# EAGLE board Panel - Type-C-31-M-12-17 (EAGLE 9.6.2)
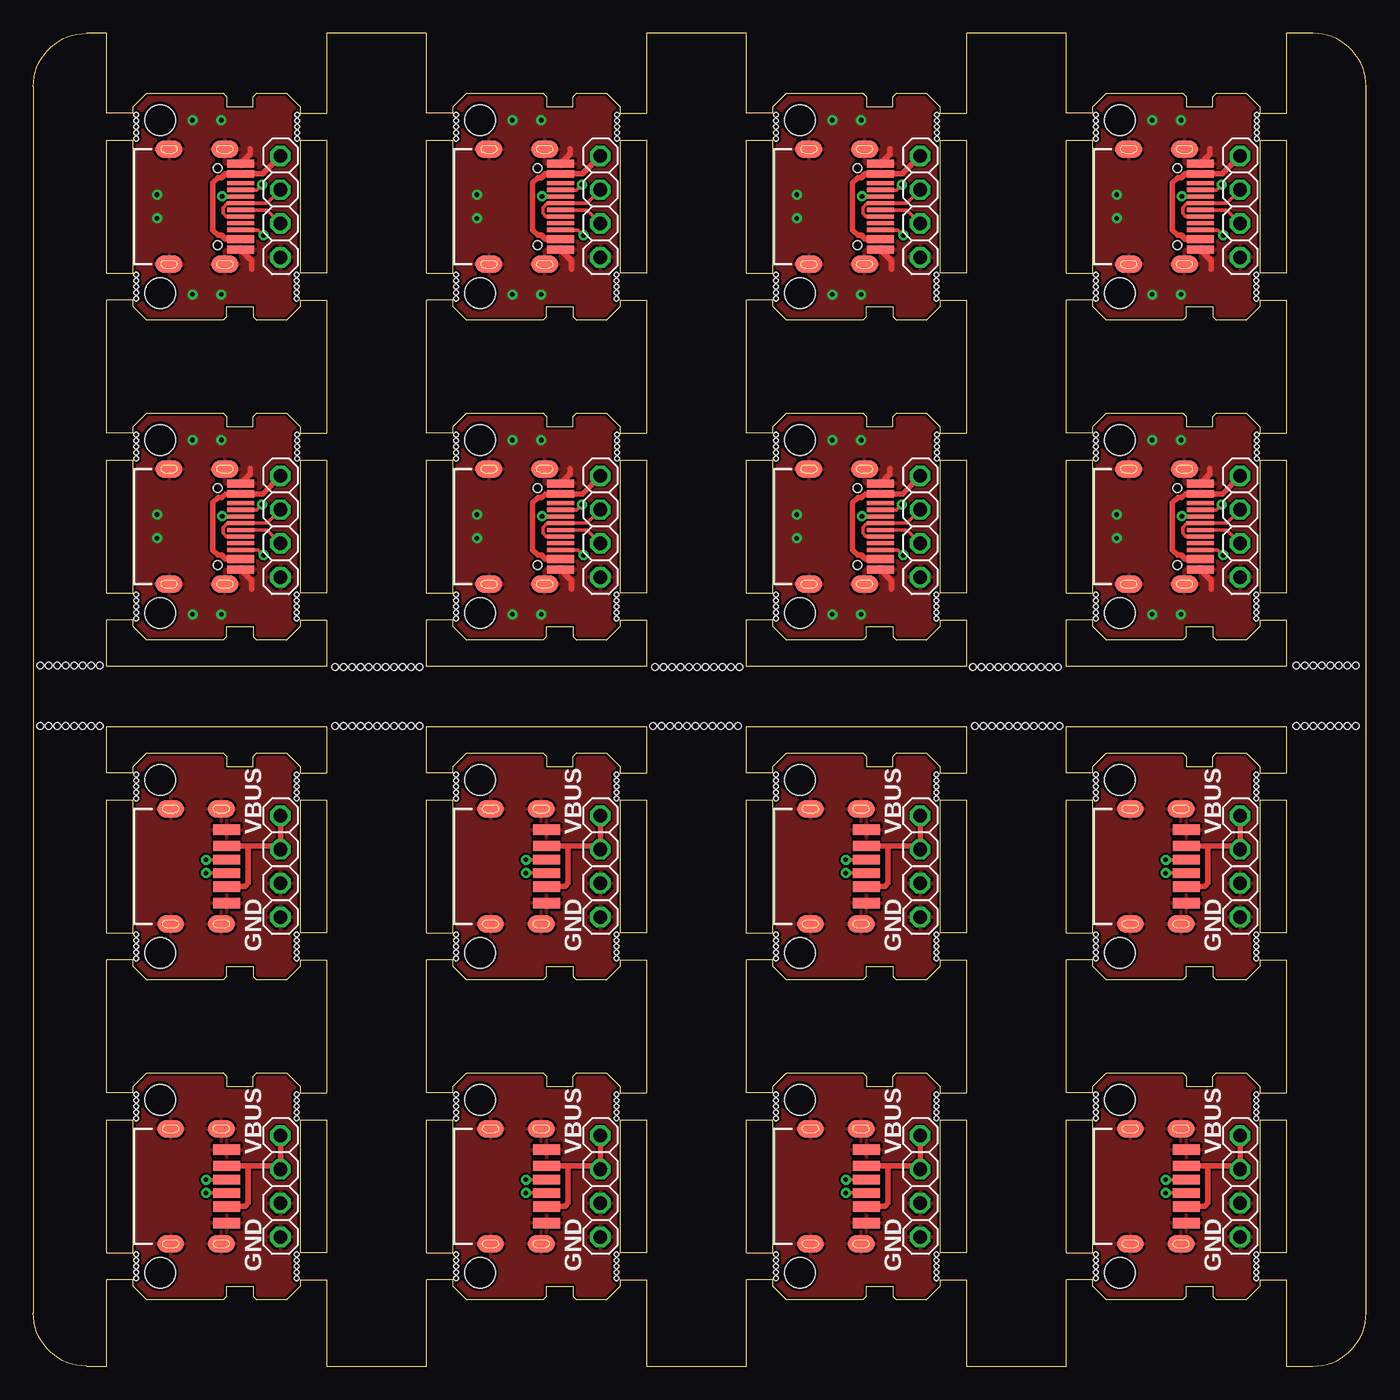
[diagram p0: board, top side]
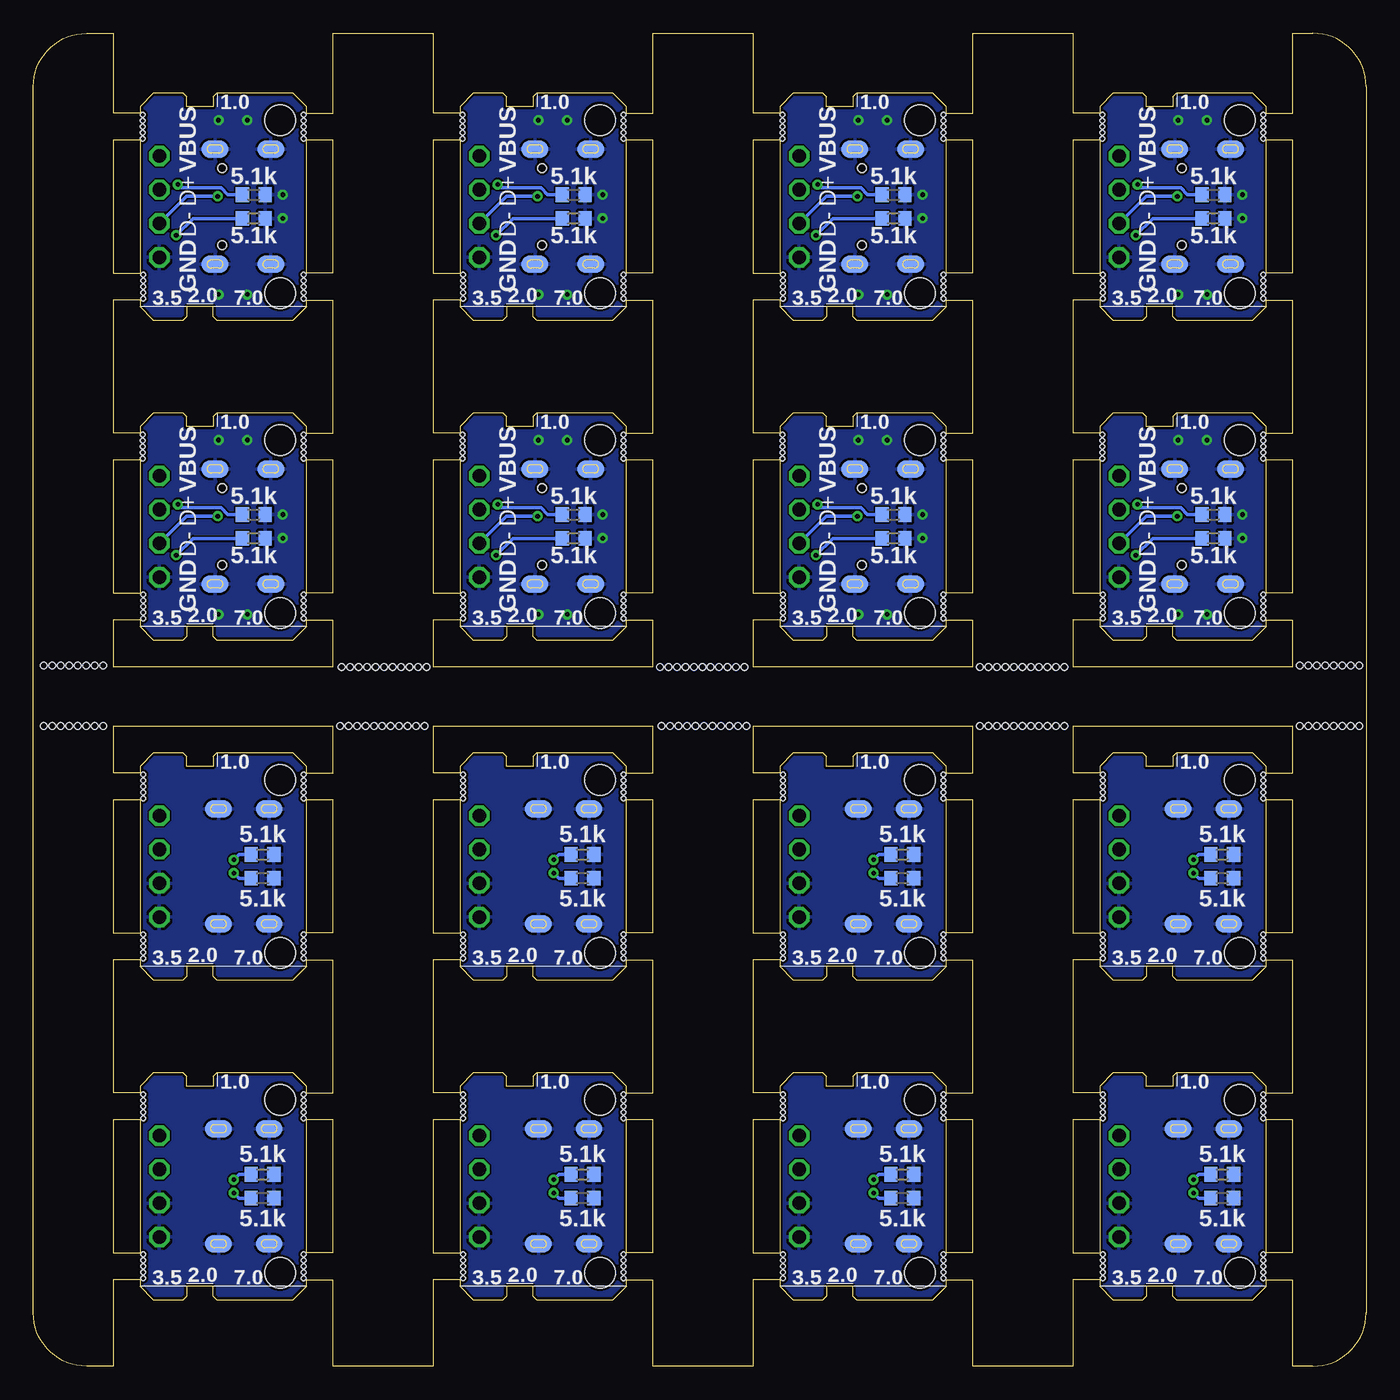
[diagram p1: board, bottom side, seen from below]

Size 100 x 100 mm. Coordinates in mm from the lower left corner, seen from the top.
Outline: 4,0 5.5,0 5.5,6.5 7.5,6.5 7.5,6 8.5,5 14.25,5 14.5,5.25 14.5,6 16.5,6 16.5,5.25 16.75,5 19,5 20,6 20,6.5 22,6.5 22,0 29.5,0 29.5,6.5 31.5,6.5 31.5,6 32.5,5 38.25,5 38.5,5.25 38.5,6 40.5,6 40.5,5.25 40.75,5 43,5 44,6 44,6.5 46,6.5 46,0 53.5,0 53.5,6.5 55.5,6.5 55.5,6 56.5,5 62.25,5 62.5,5.25 62.5,6 64.5,6 64.5,5.25 64.75,5 67,5 68,6 68,6.5 70,6.5 70,0 77.5,0 77.5,6.5 79.5,6.5 79.5,6 80.5,5 86.25,5 86.5,5.25 86.5,6 88.5,6 88.5,5.25 88.75,5 91,5 92,6 92,6.5 94,6.5 94,0 96,0 arc90 100,4 100,96 arc90 96,100 94,100 94,94 92,94 92,94.5 91,95.5 88.75,95.5 88.5,95.25 88.5,94.5 86.5,94.5 86.5,95.25 86.25,95.5 80.5,95.5 79.5,94.5 79.5,94 77.5,94 77.5,100 70,100 70,94 68,94 68,94.5 67,95.5 64.75,95.5 64.5,95.25 64.5,94.5 62.5,94.5 62.5,95.25 62.25,95.5 56.5,95.5 55.5,94.5 55.5,94 53.5,94 53.5,100 46,100 46,94 44,94 44,94.5 43,95.5 40.75,95.5 40.5,95.25 40.5,94.5 38.5,94.5 38.5,95.25 38.25,95.5 32.5,95.5 31.5,94.5 31.5,94 29.5,94 29.5,100 22,100 22,94 20,94 20,94.5 19,95.5 16.75,95.5 16.5,95.25 16.5,94.5 14.5,94.5 14.5,95.25 14.25,95.5 8.5,95.5 7.5,94.5 7.5,94 5.5,94 5.5,100 4,100 arc90 0,96 0,4 arc90 4,0
Outline: 7.5,79.5 7.5,80 5.5,80 5.5,70 7.5,70 7.5,70.5 8.5,71.5 14.25,71.5 14.5,71.25 14.5,70.5 16.5,70.5 16.5,71.25 16.75,71.5 19,71.5 20,70.5 20,70 22,70 22,80 20,80 20,79.5 19,78.5 16.75,78.5 16.5,78.75 16.5,79.5 14.5,79.5 14.5,78.75 14.25,78.5 8.5,78.5 7.5,79.5
Outline: 7.5,82 7.5,92 5.5,92 5.5,82 7.5,82
Outline: 20,92 20,82 22,82 22,92 20,92
Outline: 31.5,79.5 31.5,80 29.5,80 29.5,70 31.5,70 31.5,70.5 32.5,71.5 38.25,71.5 38.5,71.25 38.5,70.5 40.5,70.5 40.5,71.25 40.75,71.5 43,71.5 44,70.5 44,70 46,70 46,80 44,80 44,79.5 43,78.5 40.75,78.5 40.5,78.75 40.5,79.5 38.5,79.5 38.5,78.75 38.25,78.5 32.5,78.5 31.5,79.5
Outline: 31.5,82 31.5,92 29.5,92 29.5,82 31.5,82
Outline: 44,92 44,82 46,82 46,92 44,92
Outline: 55.5,79.5 55.5,80 53.5,80 53.5,70 55.5,70 55.5,70.5 56.5,71.5 62.25,71.5 62.5,71.25 62.5,70.5 64.5,70.5 64.5,71.25 64.75,71.5 67,71.5 68,70.5 68,70 70,70 70,80 68,80 68,79.5 67,78.5 64.75,78.5 64.5,78.75 64.5,79.5 62.5,79.5 62.5,78.75 62.25,78.5 56.5,78.5 55.5,79.5
Outline: 55.5,82 55.5,92 53.5,92 53.5,82 55.5,82
Outline: 68,92 68,82 70,82 70,92 68,92
Outline: 79.5,79.5 79.5,80 77.5,80 77.5,70 79.5,70 79.5,70.5 80.5,71.5 86.25,71.5 86.5,71.25 86.5,70.5 88.5,70.5 88.5,71.25 88.75,71.5 91,71.5 92,70.5 92,70 94,70 94,80 92,80 92,79.5 91,78.5 88.75,78.5 88.5,78.75 88.5,79.5 86.5,79.5 86.5,78.75 86.25,78.5 80.5,78.5 79.5,79.5
Outline: 79.5,82 79.5,92 77.5,92 77.5,82 79.5,82
Outline: 92,92 92,82 94,82 94,92 92,92
Outline: 7.5,55.5 7.5,56 5.5,56 5.5,52.5 22,52.5 22,56 20,56 20,55.5 19,54.5 16.75,54.5 16.5,54.75 16.5,55.5 14.5,55.5 14.5,54.75 14.25,54.5 8.5,54.5 7.5,55.5
Outline: 7.5,58 7.5,68 5.5,68 5.5,58 7.5,58
Outline: 20,68 20,58 22,58 22,68 20,68
Outline: 31.5,55.5 31.5,56 29.5,56 29.5,52.5 46,52.5 46,56 44,56 44,55.5 43,54.5 40.75,54.5 40.5,54.75 40.5,55.5 38.5,55.5 38.5,54.75 38.25,54.5 32.5,54.5 31.5,55.5
Outline: 31.5,58 31.5,68 29.5,68 29.5,58 31.5,58
Outline: 44,68 44,58 46,58 46,68 44,68
Outline: 55.5,55.5 55.5,56 53.5,56 53.5,52.5 70,52.5 70,56 68,56 68,55.5 67,54.5 64.75,54.5 64.5,54.75 64.5,55.5 62.5,55.5 62.5,54.75 62.25,54.5 56.5,54.5 55.5,55.5
Outline: 55.5,58 55.5,68 53.5,68 53.5,58 55.5,58
Outline: 68,68 68,58 70,58 70,68 68,68
Outline: 79.5,55.5 79.5,56 77.5,56 77.5,52.5 94,52.5 94,56 92,56 92,55.5 91,54.5 88.75,54.5 88.5,54.75 88.5,55.5 86.5,55.5 86.5,54.75 86.25,54.5 80.5,54.5 79.5,55.5
Outline: 79.5,58 79.5,68 77.5,68 77.5,58 79.5,58
Outline: 92,68 92,58 94,58 94,68 92,68
Outline: 7.5,30 7.5,30.5 5.5,30.5 5.5,20.5 7.5,20.5 7.5,21 8.5,22 14.25,22 14.5,21.75 14.5,21 16.5,21 16.5,21.75 16.75,22 19,22 20,21 20,20.5 22,20.5 22,30.5 20,30.5 20,30 19,29 16.75,29 16.5,29.25 16.5,30 14.5,30 14.5,29.25 14.25,29 8.5,29 7.5,30
Outline: 7.5,32.5 7.5,42.5 5.5,42.5 5.5,32.5 7.5,32.5
Outline: 7.5,44.5 7.5,45 8.5,46 14.25,46 14.5,45.75 14.5,45 16.5,45 16.5,45.75 16.75,46 19,46 20,45 20,44.5 22,44.5 22,48 5.5,48 5.5,44.5 7.5,44.5
Outline: 20,42.5 20,32.5 22,32.5 22,42.5 20,42.5
Outline: 31.5,30 31.5,30.5 29.5,30.5 29.5,20.5 31.5,20.5 31.5,21 32.5,22 38.25,22 38.5,21.75 38.5,21 40.5,21 40.5,21.75 40.75,22 43,22 44,21 44,20.5 46,20.5 46,30.5 44,30.5 44,30 43,29 40.75,29 40.5,29.25 40.5,30 38.5,30 38.5,29.25 38.25,29 32.5,29 31.5,30
Outline: 31.5,32.5 31.5,42.5 29.5,42.5 29.5,32.5 31.5,32.5
Outline: 31.5,44.5 31.5,45 32.5,46 38.25,46 38.5,45.75 38.5,45 40.5,45 40.5,45.75 40.75,46 43,46 44,45 44,44.5 46,44.5 46,48 29.5,48 29.5,44.5 31.5,44.5
Outline: 44,42.5 44,32.5 46,32.5 46,42.5 44,42.5
Outline: 55.5,30 55.5,30.5 53.5,30.5 53.5,20.5 55.5,20.5 55.5,21 56.5,22 62.25,22 62.5,21.75 62.5,21 64.5,21 64.5,21.75 64.75,22 67,22 68,21 68,20.5 70,20.5 70,30.5 68,30.5 68,30 67,29 64.75,29 64.5,29.25 64.5,30 62.5,30 62.5,29.25 62.25,29 56.5,29 55.5,30
Outline: 55.5,32.5 55.5,42.5 53.5,42.5 53.5,32.5 55.5,32.5
Outline: 55.5,44.5 55.5,45 56.5,46 62.25,46 62.5,45.75 62.5,45 64.5,45 64.5,45.75 64.75,46 67,46 68,45 68,44.5 70,44.5 70,48 53.5,48 53.5,44.5 55.5,44.5
Outline: 68,42.5 68,32.5 70,32.5 70,42.5 68,42.5
Outline: 79.5,30 79.5,30.5 77.5,30.5 77.5,20.5 79.5,20.5 79.5,21 80.5,22 86.25,22 86.5,21.75 86.5,21 88.5,21 88.5,21.75 88.75,22 91,22 92,21 92,20.5 94,20.5 94,30.5 92,30.5 92,30 91,29 88.75,29 88.5,29.25 88.5,30 86.5,30 86.5,29.25 86.25,29 80.5,29 79.5,30
Outline: 79.5,32.5 79.5,42.5 77.5,42.5 77.5,32.5 79.5,32.5
Outline: 79.5,44.5 79.5,45 80.5,46 86.25,46 86.5,45.75 86.5,45 88.5,45 88.5,45.75 88.75,46 91,46 92,45 92,44.5 94,44.5 94,48 77.5,48 77.5,44.5 79.5,44.5
Outline: 92,42.5 92,32.5 94,32.5 94,42.5 92,42.5
Outline: 7.5,8.5 7.5,18.5 5.5,18.5 5.5,8.5 7.5,8.5
Outline: 20,18.5 20,8.5 22,8.5 22,18.5 20,18.5
Outline: 31.5,8.5 31.5,18.5 29.5,18.5 29.5,8.5 31.5,8.5
Outline: 44,18.5 44,8.5 46,8.5 46,18.5 44,18.5
Outline: 55.5,8.5 55.5,18.5 53.5,18.5 53.5,8.5 55.5,8.5
Outline: 68,18.5 68,8.5 70,8.5 70,18.5 68,18.5
Outline: 79.5,8.5 79.5,18.5 77.5,18.5 77.5,8.5 79.5,8.5
Outline: 92,18.5 92,8.5 94,8.5 94,18.5 92,18.5
Copper layers (1*16): Top 0.035mm / dielectric 1.5mm / Bottom 0.035mm
Design rules "JLCPCB_2-Layer": minimum track width 5mil, minimum drill 0.2mm, track to track 5mil, track to pad 5mil, pad to pad 5mil, via to via 5mil, smd to smd 5mil, copper to edge 8mil, drill to drill 3mil, minimum pad ring 3mil, minimum via ring 0.2mm, stop-mask expansion 4mil, vias tented up to drill 15mil, thermal gap 8mil
Net classes: 0 default: width 0.254 mm; 1 power: width 0.406 mm
Holes 2.3 mm at 9.5,93.5 9.5,80.5 33.5,93.5 33.5,80.5 57.5,93.5 57.5,80.5 81.5,93.5 81.5,80.5 9.5,69.5 9.5,56.5 33.5,69.5 33.5,56.5 57.5,69.5 57.5,56.5 81.5,69.5 81.5,56.5 9.5,44 9.5,31 33.5,44 33.5,31 57.5,44 57.5,31 81.5,44 81.5,31 9.5,20 9.5,7 33.5,20 33.5,7 57.5,20 57.5,7 81.5,20 81.5,7
Holes 0.35 mm at 7.71,93.91 7.71,93.46 7.71,93.01 7.71,92.56 7.71,92.11 19.8,93.91 19.8,93.46 19.8,93.01 19.8,92.56 19.8,92.11 19.77,81.89 19.77,81.44 19.77,80.99 19.77,80.54 19.77,80.09 7.71,81.89 7.71,81.44 7.71,80.99 7.71,80.54 7.71,80.09 31.71,93.91 31.71,93.46 31.71,93.01 31.71,92.56 31.71,92.11 43.8,93.91 43.8,93.46 43.8,93.01 43.8,92.56 43.8,92.11 43.77,81.89 43.77,81.44 43.77,80.99 43.77,80.54 43.77,80.09 31.71,81.89 31.71,81.44 31.71,80.99 31.71,80.54 31.71,80.09 55.71,93.91 55.71,93.46 55.71,93.01 55.71,92.56 55.71,92.11 67.8,93.91 67.8,93.46 67.8,93.01 67.8,92.56 67.8,92.11 67.77,81.89 67.77,81.44 67.77,80.99 67.77,80.54 67.77,80.09 55.71,81.89 55.71,81.44 55.71,80.99 55.71,80.54 55.71,80.09 79.71,93.91 79.71,93.46 79.71,93.01 79.71,92.56 79.71,92.11 91.8,93.91 91.8,93.46 91.8,93.01 91.8,92.56 91.8,92.11 91.77,81.89 91.77,81.44 91.77,80.99 91.77,80.54 91.77,80.09 79.71,81.89 79.71,81.44 79.71,80.99 79.71,80.54 79.71,80.09 7.71,69.91 7.71,69.46 7.71,69.01 7.71,68.56 7.71,68.11 19.8,69.91 19.8,69.46 19.8,69.01 19.8,68.56 19.8,68.11 19.77,57.89 19.77,57.44 19.77,56.99 19.77,56.54 19.77,56.09 7.71,57.89 7.71,57.44 7.71,56.99 7.71,56.54 7.71,56.09 31.71,69.91 31.71,69.46 31.71,69.01 31.71,68.56 31.71,68.11 43.8,69.91 43.8,69.46 43.8,69.01 43.8,68.56 43.8,68.11 43.77,57.89 43.77,57.44 43.77,56.99 43.77,56.54 43.77,56.09 31.71,57.89 31.71,57.44 31.71,56.99 31.71,56.54 31.71,56.09 55.71,69.91 55.71,69.46 55.71,69.01 55.71,68.56 55.71,68.11 67.8,69.91 67.8,69.46 67.8,69.01 67.8,68.56 67.8,68.11 67.77,57.89 67.77,57.44 67.77,56.99 67.77,56.54 67.77,56.09 55.71,57.89 55.71,57.44 55.71,56.99 55.71,56.54 55.71,56.09 79.71,69.91 79.71,69.46 79.71,69.01 79.71,68.56 79.71,68.11 91.8,69.91 91.8,69.46 91.8,69.01 91.8,68.56 91.8,68.11 91.77,57.89 91.77,57.44 91.77,56.99 91.77,56.54 91.77,56.09 79.71,57.89 79.71,57.44 79.71,56.99 79.71,56.54 79.71,56.09 7.71,44.41 7.71,43.96 7.71,43.51 7.71,43.06 7.71,42.61 19.77,44.38 19.77,43.93 19.77,43.48 19.77,43.03 19.77,42.58 19.77,32.39 19.77,31.94 19.77,31.49 19.77,31.04 19.77,30.59 7.73,32.39 7.73,31.94 7.73,31.49 7.73,31.04 7.73,30.59 31.71,44.41 31.71,43.96 31.71,43.51 31.71,43.06 31.71,42.61 43.77,44.38 43.77,43.93 43.77,43.48 43.77,43.03 43.77,42.58 43.77,32.39 43.77,31.94 43.77,31.49 43.77,31.04 43.77,30.59 31.73,32.39 31.73,31.94 31.73,31.49 31.73,31.04 31.73,30.59 55.71,44.41 55.71,43.96 55.71,43.51 55.71,43.06 55.71,42.61 67.77,44.38 67.77,43.93 67.77,43.48 67.77,43.03 67.77,42.58 67.77,32.39 67.77,31.94 67.77,31.49 67.77,31.04 67.77,30.59 55.73,32.39 55.73,31.94 55.73,31.49 55.73,31.04 55.73,30.59 79.71,44.41 79.71,43.96 79.71,43.51 79.71,43.06 79.71,42.61 91.77,44.38 91.77,43.93 91.77,43.48 91.77,43.03 91.77,42.58 91.77,32.39 91.77,31.94 91.77,31.49 91.77,31.04 91.77,30.59 79.73,32.39 79.73,31.94 79.73,31.49 79.73,31.04 79.73,30.59 7.71,20.41 7.71,19.96 7.71,19.51 7.71,19.06 7.71,18.61 19.77,20.38 19.77,19.93 19.77,19.48 19.77,19.03 19.77,18.58 19.77,8.39 19.77,7.94 19.77,7.49 19.77,7.04 19.77,6.59 7.73,8.39 7.73,7.94 7.73,7.49 7.73,7.04 7.73,6.59 31.71,20.41 31.71,19.96 31.71,19.51 31.71,19.06 31.71,18.61 43.77,20.38 43.77,19.93 43.77,19.48 43.77,19.03 43.77,18.58 43.77,8.39 43.77,7.94 43.77,7.49 43.77,7.04 43.77,6.59 31.73,8.39 31.73,7.94 31.73,7.49 31.73,7.04 31.73,6.59 55.71,20.41 55.71,19.96 55.71,19.51 55.71,19.06 55.71,18.61 67.77,20.38 67.77,19.93 67.77,19.48 67.77,19.03 67.77,18.58 67.77,8.39 67.77,7.94 67.77,7.49 67.77,7.04 67.77,6.59 55.73,8.39 55.73,7.94 55.73,7.49 55.73,7.04 55.73,6.59 79.71,20.41 79.71,19.96 79.71,19.51 79.71,19.06 79.71,18.61 91.77,20.38 91.77,19.93 91.77,19.48 91.77,19.03 91.77,18.58 91.77,8.39 91.77,7.94 91.77,7.49 91.77,7.04 91.77,6.59 79.73,8.39 79.73,7.94 79.73,7.49 79.73,7.04 79.73,6.59
Holes 0.5 mm at 22.63,48.01 23.27,48.01 23.9,48.01 24.54,48.01 25.17,48.01 25.81,48.01 26.44,48.01 27.08,48.01 27.71,48.01 28.35,48.01 28.98,48.01 46.51,48.01 47.14,48.01 47.78,48.01 48.41,48.01 49.05,48.01 49.68,48.01 50.32,48.01 50.95,48.01 51.59,48.01 52.22,48.01 52.86,48.01 22.63,52.46 23.27,52.46 23.9,52.46 24.54,52.46 25.17,52.46 25.81,52.46 26.44,52.46 27.08,52.46 27.71,52.46 28.35,52.46 28.98,52.46 46.64,52.46 47.27,52.46 47.91,52.46 48.54,52.46 49.18,52.46 49.81,52.46 50.45,52.46 51.08,52.46 51.72,52.46 52.35,52.46 52.99,52.46 70.51,52.46 71.15,52.46 71.78,52.46 72.42,52.46 73.05,52.46 73.69,52.46 74.32,52.46 74.96,52.46 75.59,52.46 76.23,52.46 76.86,52.46 70.64,48.01 71.27,48.01 71.91,48.01 72.54,48.01 73.18,48.01 73.81,48.01 74.45,48.01 75.08,48.01 75.72,48.01 76.35,48.01 76.99,48.01 0.54,52.59 1.17,52.59 1.8,52.59 2.44,52.59 3.08,52.59 3.71,52.59 4.34,52.59 4.98,52.59 0.54,48.01 1.17,48.01 1.8,48.01 2.44,48.01 3.08,48.01 3.71,48.01 4.34,48.01 4.98,48.01 94.77,52.59 95.4,52.59 96.04,52.59 96.67,52.59 97.31,52.59 97.94,52.59 98.58,52.59 99.21,52.59 94.77,48.01 95.4,48.01 96.04,48.01 96.67,48.01 97.31,48.01 97.94,48.01 98.58,48.01 99.21,48.01

## Footprints (pad centres in the part's own frame; a part is rotated, then mirrored left to right if it is on the bottom)
USB-TYPE-C-31-M-12 = smd 0.3 x 2: A5 -1.25,1.19; A6 -0.25,1.19; A7 0.25,1.19; A8 1.25,1.19; B5 1.75,1.19; B6 0.75,1.19; B7 -0.75,1.19; B8 -1.75,1.19 | smd 0.6 x 2: GND1 -3.225,1.19; GND2 3.225,1.19; VBUS1 -2.45,1.19; VBUS2 2.45,1.19 | smd 1.3 x 2 bottom: SHLD-B1 -4.32,0; SHLD-B2 4.32,0; SHLD-B3 -4.32,-4.18; SHLD-B4 4.32,-4.18 | smd 1.3 x 2: SHLD-T1 -4.32,0; SHLD-T2 4.32,0; SHLD-T3 -4.32,-4.18; SHLD-T4 4.32,-4.18 | hole 0.65: -2.89,-0.53; 2.89,-0.53
USB-TYPE-C-31-M-17 = smd 0.7 x 2: CC1 -0.5,0.4; CC2 0.5,0.4 | smd 0.8 x 2: GND -2.75,0.4; GND_2 2.75,0.4 | smd 1.3 x 2 bottom: SHLD-B1 -4.32,0; SHLD-B2 4.32,0; SHLD-B3 -4.32,-3.8; SHLD-B4 4.32,-3.8 | smd 1.3 x 2: SHLD-T1 -4.32,0; SHLD-T2 4.32,0; SHLD-T3 -4.32,-3.8; SHLD-T4 4.32,-3.8 | smd 0.76 x 2: VBUS -1.52,0.4; VBUS_2 1.52,0.4
1X04 = drill 1.016 octagon: 1 -3.81,0; 2 -1.27,0; 3 1.27,0; 4 3.81,0
R0603 = smd 1 x 1.1: 1 -0.85,0; 2 0.85,0

## Placement (x,y rotation side)
J1  USB-TYPE-C-31-M-12  [USB-TYPE-C-31-M-12]  14.37,87 270 top
J2  USB-TYPE-C-31-M-12  [USB-TYPE-C-31-M-12]  38.37,87 270 top
J3  USB-TYPE-C-31-M-12  [USB-TYPE-C-31-M-12]  62.37,87 270 top
J4  USB-TYPE-C-31-M-12  [USB-TYPE-C-31-M-12]  86.37,87 270 top
J5  USB-TYPE-C-31-M-12  [USB-TYPE-C-31-M-12]  14.37,63 270 top
J6  USB-TYPE-C-31-M-12  [USB-TYPE-C-31-M-12]  38.37,63 270 top
J7  USB-TYPE-C-31-M-12  [USB-TYPE-C-31-M-12]  62.37,63 270 top
J8  USB-TYPE-C-31-M-12  [USB-TYPE-C-31-M-12]  86.37,63 270 top
J9  USB-TYPE-C-31-M-17  [USB-TYPE-C-31-M-17]  14.1,37.5 270 top
J10  USB-TYPE-C-31-M-17  [USB-TYPE-C-31-M-17]  38.1,37.5 270 top
J11  USB-TYPE-C-31-M-17  [USB-TYPE-C-31-M-17]  62.1,37.5 270 top
J12  USB-TYPE-C-31-M-17  [USB-TYPE-C-31-M-17]  86.1,37.5 270 top
J13  USB-TYPE-C-31-M-17  [USB-TYPE-C-31-M-17]  14.1,13.5 270 top
J14  USB-TYPE-C-31-M-17  [USB-TYPE-C-31-M-17]  38.1,13.5 270 top
J15  USB-TYPE-C-31-M-17  [USB-TYPE-C-31-M-17]  62.1,13.5 270 top
J16  USB-TYPE-C-31-M-17  [USB-TYPE-C-31-M-17]  86.1,13.5 270 top
JP1  [1X04]  18.55,87 270 top
JP2  [1X04]  42.55,87 270 top
JP3  [1X04]  66.55,87 270 top
JP4  [1X04]  90.55,87 270 top
JP5  [1X04]  18.55,63 270 top
JP6  [1X04]  42.55,63 270 top
JP7  [1X04]  66.55,63 270 top
JP8  [1X04]  90.55,63 270 top
JP9  [1X04]  18.55,37.5 270 top
JP10  [1X04]  42.55,37.5 270 top
JP11  [1X04]  66.55,37.5 270 top
JP12  [1X04]  90.55,37.5 270 top
JP13  [1X04]  18.55,13.5 270 top
JP14  [1X04]  42.55,13.5 270 top
JP15  [1X04]  66.55,13.5 270 top
JP16  [1X04]  90.55,13.5 270 top
R1  5.1k  [R0603]  11.46,87.89 0 bottom
R2  5.1k  [R0603]  11.46,86.11 0 bottom
R3  5.1k  [R0603]  35.46,87.89 0 bottom
R4  5.1k  [R0603]  35.46,86.11 0 bottom
R5  5.1k  [R0603]  59.46,87.89 0 bottom
R6  5.1k  [R0603]  59.46,86.11 0 bottom
R7  5.1k  [R0603]  83.46,87.89 0 bottom
R8  5.1k  [R0603]  83.46,86.11 0 bottom
R9  5.1k  [R0603]  11.46,63.89 0 bottom
R10  5.1k  [R0603]  11.46,62.11 0 bottom
R11  5.1k  [R0603]  35.46,63.89 0 bottom
R12  5.1k  [R0603]  35.46,62.11 0 bottom
R13  5.1k  [R0603]  59.46,63.89 0 bottom
R14  5.1k  [R0603]  59.46,62.11 0 bottom
R15  5.1k  [R0603]  83.46,63.89 0 bottom
R16  5.1k  [R0603]  83.46,62.11 0 bottom
R17  5.1k  [R0603]  10.8,38.39 0 bottom
R18  5.1k  [R0603]  10.8,36.61 0 bottom
R19  5.1k  [R0603]  34.8,38.39 0 bottom
R20  5.1k  [R0603]  34.8,36.61 0 bottom
R21  5.1k  [R0603]  58.8,38.39 0 bottom
R22  5.1k  [R0603]  58.8,36.61 0 bottom
R23  5.1k  [R0603]  82.8,38.39 0 bottom
R24  5.1k  [R0603]  82.8,36.61 0 bottom
R25  5.1k  [R0603]  10.8,14.39 0 bottom
R26  5.1k  [R0603]  10.8,12.61 0 bottom
R27  5.1k  [R0603]  34.8,14.39 0 bottom
R28  5.1k  [R0603]  34.8,12.61 0 bottom
R29  5.1k  [R0603]  58.8,14.39 0 bottom
R30  5.1k  [R0603]  58.8,12.61 0 bottom
R31  5.1k  [R0603]  82.8,14.39 0 bottom
R32  5.1k  [R0603]  82.8,12.61 0 bottom

## Library data of the parts
J1-J16 = angrypig7-Connectors
JP1-JP16 = angrypig7-Connectors-PinHeads
R1-R32 = angrypig7-RCL; SPICEPREFIX: R

## Nets
GND [power]: J1.GND1 J1.GND2 J1.SHLD-B1 J1.SHLD-B2 J1.SHLD-B3 J1.SHLD-B4 J1.SHLD-T1 J1.SHLD-T2 J1.SHLD-T3 J1.SHLD-T4 JP1.4 R1.2 R2.2
GND1 [power]: J2.GND1 J2.GND2 J2.SHLD-B1 J2.SHLD-B2 J2.SHLD-B3 J2.SHLD-B4 J2.SHLD-T1 J2.SHLD-T2 J2.SHLD-T3 J2.SHLD-T4 JP2.4 R3.2 R4.2
GND2 [power]: J3.GND1 J3.GND2 J3.SHLD-B1 J3.SHLD-B2 J3.SHLD-B3 J3.SHLD-B4 J3.SHLD-T1 J3.SHLD-T2 J3.SHLD-T3 J3.SHLD-T4 JP3.4 R5.2 R6.2
GND3 [power]: J4.GND1 J4.GND2 J4.SHLD-B1 J4.SHLD-B2 J4.SHLD-B3 J4.SHLD-B4 J4.SHLD-T1 J4.SHLD-T2 J4.SHLD-T3 J4.SHLD-T4 JP4.4 R7.2 R8.2
GND4 [power]: J5.GND1 J5.GND2 J5.SHLD-B1 J5.SHLD-B2 J5.SHLD-B3 J5.SHLD-B4 J5.SHLD-T1 J5.SHLD-T2 J5.SHLD-T3 J5.SHLD-T4 JP5.4 R9.2 R10.2
GND5 [power]: J6.GND1 J6.GND2 J6.SHLD-B1 J6.SHLD-B2 J6.SHLD-B3 J6.SHLD-B4 J6.SHLD-T1 J6.SHLD-T2 J6.SHLD-T3 J6.SHLD-T4 JP6.4 R11.2 R12.2
GND6 [power]: J7.GND1 J7.GND2 J7.SHLD-B1 J7.SHLD-B2 J7.SHLD-B3 J7.SHLD-B4 J7.SHLD-T1 J7.SHLD-T2 J7.SHLD-T3 J7.SHLD-T4 JP7.4 R13.2 R14.2
GND7 [power]: J8.GND1 J8.GND2 J8.SHLD-B1 J8.SHLD-B2 J8.SHLD-B3 J8.SHLD-B4 J8.SHLD-T1 J8.SHLD-T2 J8.SHLD-T3 J8.SHLD-T4 JP8.4 R15.2 R16.2
GND8 [power]: J9.GND J9.GND_2 J9.SHLD-B1 J9.SHLD-B2 J9.SHLD-B3 J9.SHLD-B4 J9.SHLD-T1 J9.SHLD-T2 J9.SHLD-T3 J9.SHLD-T4 JP9.3 JP9.4 R17.2 R18.2
GND9 [power]: J10.GND J10.GND_2 J10.SHLD-B1 J10.SHLD-B2 J10.SHLD-B3 J10.SHLD-B4 J10.SHLD-T1 J10.SHLD-T2 J10.SHLD-T3 J10.SHLD-T4 JP10.3 JP10.4 R19.2 R20.2
GND10 [power]: J11.GND J11.GND_2 J11.SHLD-B1 J11.SHLD-B2 J11.SHLD-B3 J11.SHLD-B4 J11.SHLD-T1 J11.SHLD-T2 J11.SHLD-T3 J11.SHLD-T4 JP11.3 JP11.4 R21.2 R22.2
GND11 [power]: J12.GND J12.GND_2 J12.SHLD-B1 J12.SHLD-B2 J12.SHLD-B3 J12.SHLD-B4 J12.SHLD-T1 J12.SHLD-T2 J12.SHLD-T3 J12.SHLD-T4 JP12.3 JP12.4 R23.2 R24.2
GND12 [power]: J13.GND J13.GND_2 J13.SHLD-B1 J13.SHLD-B2 J13.SHLD-B3 J13.SHLD-B4 J13.SHLD-T1 J13.SHLD-T2 J13.SHLD-T3 J13.SHLD-T4 JP13.3 JP13.4 R25.2 R26.2
GND13 [power]: J14.GND J14.GND_2 J14.SHLD-B1 J14.SHLD-B2 J14.SHLD-B3 J14.SHLD-B4 J14.SHLD-T1 J14.SHLD-T2 J14.SHLD-T3 J14.SHLD-T4 JP14.3 JP14.4 R27.2 R28.2
GND14 [power]: J15.GND J15.GND_2 J15.SHLD-B1 J15.SHLD-B2 J15.SHLD-B3 J15.SHLD-B4 J15.SHLD-T1 J15.SHLD-T2 J15.SHLD-T3 J15.SHLD-T4 JP15.3 JP15.4 R29.2 R30.2
GND15 [power]: J16.GND J16.GND_2 J16.SHLD-B1 J16.SHLD-B2 J16.SHLD-B3 J16.SHLD-B4 J16.SHLD-T1 J16.SHLD-T2 J16.SHLD-T3 J16.SHLD-T4 JP16.3 JP16.4 R31.2 R32.2
N$1: J2.A6 J2.B6 JP2.2
N$2: J1.A6 J1.B6 JP1.2
N$3: J1.A7 J1.B7 JP1.3
N$4: J2.A7 J2.B7 JP2.3
N$5: J1.A5 R1.1
N$6: J1.B5 R2.1
N$7: J2.A5 R3.1
N$8: J2.B5 R4.1
N$9: J3.A6 J3.B6 JP3.2
N$10: J3.A7 J3.B7 JP3.3
N$11: J3.A5 R5.1
N$12: J3.B5 R6.1
N$13: J4.A6 J4.B6 JP4.2
N$14: J4.A7 J4.B7 JP4.3
N$15: J4.A5 R7.1
N$16: J4.B5 R8.1
N$17: J5.A6 J5.B6 JP5.2
N$18: J5.A7 J5.B7 JP5.3
N$19: J5.A5 R9.1
N$20: J5.B5 R10.1
N$21: J6.A6 J6.B6 JP6.2
N$22: J6.A7 J6.B7 JP6.3
N$23: J6.A5 R11.1
N$24: J6.B5 R12.1
N$25: J7.A6 J7.B6 JP7.2
N$26: J7.A7 J7.B7 JP7.3
N$27: J7.A5 R13.1
N$28: J7.B5 R14.1
N$29: J8.A6 J8.B6 JP8.2
N$30: J8.A7 J8.B7 JP8.3
N$31: J8.A5 R15.1
N$32: J8.B5 R16.1
N$33: J9.CC1 R17.1
N$34: J9.CC2 R18.1
N$35: J10.CC1 R19.1
N$36: J10.CC2 R20.1
N$37: J11.CC1 R21.1
N$38: J11.CC2 R22.1
N$39: J12.CC1 R23.1
N$40: J12.CC2 R24.1
N$41: J13.CC1 R25.1
N$42: J13.CC2 R26.1
N$43: J14.CC1 R27.1
N$44: J14.CC2 R28.1
N$45: J15.CC1 R29.1
N$46: J15.CC2 R30.1
N$47: J16.CC1 R31.1
N$48: J16.CC2 R32.1
VBUS [power]: J1.VBUS1 J1.VBUS2 JP1.1
VBUS1 [power]: J2.VBUS1 J2.VBUS2 JP2.1
VBUS2 [power]: J3.VBUS1 J3.VBUS2 JP3.1
VBUS3 [power]: J4.VBUS1 J4.VBUS2 JP4.1
VBUS4 [power]: J5.VBUS1 J5.VBUS2 JP5.1
VBUS5 [power]: J6.VBUS1 J6.VBUS2 JP6.1
VBUS6 [power]: J7.VBUS1 J7.VBUS2 JP7.1
VBUS7 [power]: J8.VBUS1 J8.VBUS2 JP8.1
VBUS8 [power]: J9.VBUS J9.VBUS_2 JP9.1 JP9.2
VBUS9 [power]: J10.VBUS J10.VBUS_2 JP10.1 JP10.2
VBUS10 [power]: J11.VBUS J11.VBUS_2 JP11.1 JP11.2
VBUS11 [power]: J12.VBUS J12.VBUS_2 JP12.1 JP12.2
VBUS12 [power]: J13.VBUS J13.VBUS_2 JP13.1 JP13.2
VBUS13 [power]: J14.VBUS J14.VBUS_2 JP14.1 JP14.2
VBUS14 [power]: J15.VBUS J15.VBUS_2 JP15.1 JP15.2
VBUS15 [power]: J16.VBUS J16.VBUS_2 JP16.1 JP16.2

## Tracks (layer width: path | path; a pad name or v marks a point on that pad's centre or on a via)
GND  (via drill 0.35)
  Top 0.406: J1.GND2 16.39,82.94 16.39,82.31 | J1.GND1 16.26,90.93 16.26,91.33
  other vias: 9.28,86.12 9.28,87.9 14.1,93.49 11.95,93.49 14.1,80.41 11.95,80.41
  pour Bottom: 19.75,78.63 7.75,78.63 7.75,95.37 19.75,95.37
  pour Top: 19.75,78.63 7.75,78.63 7.75,95.37 19.75,95.37
GND1  (via drill 0.35)
  Top 0.406: J2.GND2 40.39,82.94 40.39,82.31 | J2.GND1 40.26,90.93 40.26,91.33
  other vias: 33.28,86.12 33.28,87.9 38.1,93.49 35.95,93.49 38.1,80.41 35.95,80.41
  pour Bottom: 43.75,78.63 31.75,78.63 31.75,95.37 43.75,95.37
  pour Top: 43.75,78.63 31.75,78.63 31.75,95.37 43.75,95.37
GND2  (via drill 0.35)
  Top 0.406: J3.GND2 64.39,82.94 64.39,82.31 | J3.GND1 64.26,90.93 64.26,91.33
  other vias: 57.28,86.12 57.28,87.9 62.1,93.49 59.95,93.49 62.1,80.41 59.95,80.41
  pour Bottom: 67.75,78.63 55.75,78.63 55.75,95.37 67.75,95.37
  pour Top: 67.75,78.63 55.75,78.63 55.75,95.37 67.75,95.37
GND3  (via drill 0.35)
  Top 0.406: J4.GND2 88.39,82.94 88.39,82.31 | J4.GND1 88.26,90.93 88.26,91.33
  other vias: 81.28,86.12 81.28,87.9 86.1,93.49 83.94,93.49 86.1,80.41 83.94,80.41
  pour Bottom: 91.75,78.63 79.75,78.63 79.75,95.37 91.75,95.37
  pour Top: 91.75,78.63 79.75,78.63 79.75,95.37 91.75,95.37
GND4  (via drill 0.35)
  Top 0.406: J5.GND2 16.39,58.94 16.39,58.31 | J5.GND1 16.26,66.93 16.26,67.33
  other vias: 9.28,62.12 9.28,63.9 14.1,69.49 11.95,69.49 14.1,56.41 11.95,56.41
  pour Bottom: 19.75,54.63 7.75,54.63 7.75,71.37 19.75,71.37
  pour Top: 19.75,54.63 7.75,54.63 7.75,71.37 19.75,71.37
GND5  (via drill 0.35)
  Top 0.406: J6.GND2 40.39,58.94 40.39,58.31 | J6.GND1 40.26,66.93 40.26,67.33
  other vias: 33.28,62.12 33.28,63.9 38.1,69.49 35.95,69.49 38.1,56.41 35.95,56.41
  pour Bottom: 43.75,54.63 31.75,54.63 31.75,71.37 43.75,71.37
  pour Top: 43.75,54.63 31.75,54.63 31.75,71.37 43.75,71.37
GND6  (via drill 0.35)
  Top 0.406: J7.GND2 64.39,58.94 64.39,58.31 | J7.GND1 64.26,66.93 64.26,67.33
  other vias: 57.28,62.12 57.28,63.9 62.1,69.49 59.95,69.49 62.1,56.41 59.95,56.41
  pour Bottom: 67.75,54.63 55.75,54.63 55.75,71.37 67.75,71.37
  pour Top: 67.75,54.63 55.75,54.63 55.75,71.37 67.75,71.37
GND7  (via drill 0.35)
  Top 0.406: J8.GND2 88.39,58.94 88.39,58.31 | J8.GND1 88.26,66.93 88.26,67.33
  other vias: 81.28,62.12 81.28,63.9 86.1,69.49 83.94,69.49 86.1,56.41 83.94,56.41
  pour Bottom: 91.75,54.63 79.75,54.63 79.75,71.37 91.75,71.37
  pour Top: 91.75,54.63 79.75,54.63 79.75,71.37 91.75,71.37
GND8
  pour Top: 19.75,29.13 7.75,29.13 7.75,45.87 19.75,45.87
  pour Bottom: 19.75,29.13 7.75,29.13 7.75,45.87 19.75,45.87
GND9
  pour Top: 43.75,29.13 31.75,29.13 31.75,45.87 43.75,45.87
  pour Bottom: 43.75,29.13 31.75,29.13 31.75,45.87 43.75,45.87
GND10
  pour Top: 67.75,29.13 55.75,29.13 55.75,45.87 67.75,45.87
  pour Bottom: 67.75,29.13 55.75,29.13 55.75,45.87 67.75,45.87
GND11
  pour Top: 91.75,29.13 79.75,29.13 79.75,45.87 91.75,45.87
  pour Bottom: 91.75,29.13 79.75,29.13 79.75,45.87 91.75,45.87
GND12
  pour Top: 19.75,5.13 7.75,5.13 7.75,21.87 19.75,21.87
  pour Bottom: 19.75,5.13 7.75,5.13 7.75,21.87 19.75,21.87
GND13
  pour Top: 43.75,5.13 31.75,5.13 31.75,21.87 43.75,21.87
  pour Bottom: 43.75,5.13 31.75,5.13 31.75,21.87 43.75,21.87
GND14
  pour Top: 67.75,5.13 55.75,5.13 55.75,21.87 67.75,21.87
  pour Bottom: 67.75,5.13 55.75,5.13 55.75,21.87 67.75,21.87
GND15
  pour Top: 91.75,5.13 79.75,5.13 79.75,21.87 91.75,21.87
  pour Bottom: 91.75,5.13 79.75,5.13 79.75,21.87 91.75,21.87
N$1
  Top 0.254: J2.B6 38.48,86.25 38.23,86.5 38.23,86.93 38.55,87.25 J2.A6 41.53,87.25 JP2.2
N$2
  Top 0.254: J1.B6 14.48,86.25 14.23,86.5 14.23,86.93 14.55,87.25 J1.A6 17.53,87.25 JP1.2
N$3  (via drill 0.35)
  Top 0.254: JP1.3 17.53,86.75 J1.A7 | J1.B7 14.2,87.75 v14.17,87.77
  Bottom 0.254: v14.17,87.77 16.51,87.77 JP1.3
N$4  (via drill 0.35)
  Top 0.254: JP2.3 41.53,86.75 J2.A7 | J2.B7 38.2,87.75 v38.17,87.77
  Bottom 0.254: v38.17,87.77 40.51,87.77 JP2.3
N$5  (via drill 0.35)
  Top 0.254: J1.A5 16.74,88.25 v17.15,88.66
  Bottom 0.254: R1.1 13.4,87.89 13.91,88.4 16.89,88.4 v17.15,88.66
N$6  (via drill 0.35)
  Top 0.254: J1.B5 16.88,85.25 v17.28,84.85
  Bottom 0.254: v17.28,84.85 16.02,86.11 R2.1
N$7  (via drill 0.35)
  Top 0.254: J2.A5 40.74,88.25 v41.15,88.66
  Bottom 0.254: R3.1 37.4,87.89 37.91,88.4 40.89,88.4 v41.15,88.66
N$8  (via drill 0.35)
  Top 0.254: J2.B5 40.88,85.25 v41.28,84.85
  Bottom 0.254: v41.28,84.85 40.02,86.11 R4.1
N$9
  Top 0.254: J3.B6 62.48,86.25 62.23,86.5 62.23,86.93 62.55,87.25 J3.A6 65.53,87.25 JP3.2
N$10  (via drill 0.35)
  Top 0.254: JP3.3 65.53,86.75 J3.A7 | J3.B7 62.2,87.75 v62.17,87.77
  Bottom 0.254: v62.17,87.77 64.51,87.77 JP3.3
N$11  (via drill 0.35)
  Top 0.254: J3.A5 64.74,88.25 v65.15,88.66
  Bottom 0.254: R5.1 61.4,87.89 61.91,88.4 64.89,88.4 v65.15,88.66
N$12  (via drill 0.35)
  Top 0.254: J3.B5 64.88,85.25 v65.28,84.85
  Bottom 0.254: v65.28,84.85 64.02,86.11 R6.1
N$13
  Top 0.254: J4.B6 86.48,86.25 86.23,86.5 86.23,86.93 86.55,87.25 J4.A6 89.53,87.25 JP4.2
N$14  (via drill 0.35)
  Top 0.254: JP4.3 89.53,86.75 J4.A7 | J4.B7 86.19,87.75 v86.17,87.77
  Bottom 0.254: v86.17,87.77 88.51,87.77 JP4.3
N$15  (via drill 0.35)
  Top 0.254: J4.A5 88.74,88.25 v89.15,88.66
  Bottom 0.254: R7.1 85.4,87.89 85.91,88.4 88.89,88.4 v89.15,88.66
N$16  (via drill 0.35)
  Top 0.254: J4.B5 88.88,85.25 v89.28,84.85
  Bottom 0.254: v89.28,84.85 88.02,86.11 R8.1
N$17
  Top 0.254: J5.B6 14.48,62.25 14.23,62.5 14.23,62.93 14.55,63.25 J5.A6 17.53,63.25 JP5.2
N$18  (via drill 0.35)
  Top 0.254: JP5.3 17.53,62.75 J5.A7 | J5.B7 14.2,63.75 v14.17,63.77
  Bottom 0.254: v14.17,63.77 16.51,63.77 JP5.3
N$19  (via drill 0.35)
  Top 0.254: J5.A5 16.74,64.25 v17.15,64.66
  Bottom 0.254: R9.1 13.4,63.89 13.91,64.4 16.89,64.4 v17.15,64.66
N$20  (via drill 0.35)
  Top 0.254: J5.B5 16.88,61.25 v17.28,60.85
  Bottom 0.254: v17.28,60.85 16.02,62.11 R10.1
N$21
  Top 0.254: J6.B6 38.48,62.25 38.23,62.5 38.23,62.93 38.55,63.25 J6.A6 41.53,63.25 JP6.2
N$22  (via drill 0.35)
  Top 0.254: JP6.3 41.53,62.75 J6.A7 | J6.B7 38.2,63.75 v38.17,63.77
  Bottom 0.254: v38.17,63.77 40.51,63.77 JP6.3
N$23  (via drill 0.35)
  Top 0.254: J6.A5 40.74,64.25 v41.15,64.66
  Bottom 0.254: R11.1 37.4,63.89 37.91,64.4 40.89,64.4 v41.15,64.66
N$24  (via drill 0.35)
  Top 0.254: J6.B5 40.88,61.25 v41.28,60.85
  Bottom 0.254: v41.28,60.85 40.02,62.11 R12.1
N$25
  Top 0.254: J7.B6 62.48,62.25 62.23,62.5 62.23,62.93 62.55,63.25 J7.A6 65.53,63.25 JP7.2
N$26  (via drill 0.35)
  Top 0.254: JP7.3 65.53,62.75 J7.A7 | J7.B7 62.2,63.75 v62.17,63.77
  Bottom 0.254: v62.17,63.77 64.51,63.77 JP7.3
N$27  (via drill 0.35)
  Top 0.254: J7.A5 64.74,64.25 v65.15,64.66
  Bottom 0.254: R13.1 61.4,63.89 61.91,64.4 64.89,64.4 v65.15,64.66
N$28  (via drill 0.35)
  Top 0.254: J7.B5 64.88,61.25 v65.28,60.85
  Bottom 0.254: v65.28,60.85 64.02,62.11 R14.1
N$29
  Top 0.254: J8.B6 86.48,62.25 86.23,62.5 86.23,62.93 86.55,63.25 J8.A6 89.53,63.25 JP8.2
N$30  (via drill 0.35)
  Top 0.254: JP8.3 89.53,62.75 J8.A7 | J8.B7 86.19,63.75 v86.17,63.77
  Bottom 0.254: v86.17,63.77 88.51,63.77 JP8.3
N$31  (via drill 0.35)
  Top 0.254: J8.A5 88.74,64.25 v89.15,64.66
  Bottom 0.254: R15.1 85.4,63.89 85.91,64.4 88.89,64.4 v89.15,64.66
N$32  (via drill 0.35)
  Top 0.254: J8.B5 88.88,61.25 v89.28,60.85
  Bottom 0.254: v89.28,60.85 88.02,62.11 R16.1
N$33  (via drill 0.35)
  Top 0.254: J9.CC1 v12.96,38
  Bottom 0.254: R17.1 12.57,38.39 v12.96,38
N$34  (via drill 0.35)
  Top 0.254: J9.CC2 v12.96,37
  Bottom 0.254: R18.1 12.57,36.61 v12.96,37
N$35  (via drill 0.35)
  Top 0.254: J10.CC1 v36.96,38
  Bottom 0.254: R19.1 36.57,38.39 v36.96,38
N$36  (via drill 0.35)
  Top 0.254: J10.CC2 v36.96,37
  Bottom 0.254: R20.1 36.57,36.61 v36.96,37
N$37  (via drill 0.35)
  Top 0.254: J11.CC1 v60.96,38
  Bottom 0.254: R21.1 60.57,38.39 v60.96,38
N$38  (via drill 0.35)
  Top 0.254: J11.CC2 v60.96,37
  Bottom 0.254: R22.1 60.57,36.61 v60.96,37
N$39  (via drill 0.35)
  Top 0.254: J12.CC1 v84.96,38
  Bottom 0.254: R23.1 84.57,38.39 v84.96,38
N$40  (via drill 0.35)
  Top 0.254: J12.CC2 v84.96,37
  Bottom 0.254: R24.1 84.57,36.61 v84.96,37
N$41  (via drill 0.35)
  Top 0.254: J13.CC1 v12.96,14
  Bottom 0.254: R25.1 12.57,14.39 v12.96,14
N$42  (via drill 0.35)
  Top 0.254: J13.CC2 v12.96,13
  Bottom 0.254: R26.1 12.57,12.61 v12.96,13
N$43  (via drill 0.35)
  Top 0.254: J14.CC1 v36.96,14
  Bottom 0.254: R27.1 36.57,14.39 v36.96,14
N$44  (via drill 0.35)
  Top 0.254: J14.CC2 v36.96,13
  Bottom 0.254: R28.1 36.57,12.61 v36.96,13
N$45  (via drill 0.35)
  Top 0.254: J15.CC1 v60.96,14
  Bottom 0.254: R29.1 60.57,14.39 v60.96,14
N$46  (via drill 0.35)
  Top 0.254: J15.CC2 v60.96,13
  Bottom 0.254: R30.1 60.57,12.61 v60.96,13
N$47  (via drill 0.35)
  Top 0.254: J16.CC1 v84.96,14
  Bottom 0.254: R31.1 84.57,14.39 v84.96,14
N$48  (via drill 0.35)
  Top 0.254: J16.CC2 v84.96,13
  Bottom 0.254: R32.1 84.57,12.61 v84.96,13
VBUS
  Top 0.406: J1.VBUS2 14.43,84.55 14.14,84.84 13.86,84.84 13.47,85.23 13.47,88.78 13.85,89.16 14.14,89.16 14.43,89.45 J1.VBUS1 17.19,89.45 JP1.1
VBUS1
  Top 0.406: J2.VBUS2 38.43,84.55 38.14,84.84 37.86,84.84 37.47,85.23 37.47,88.78 37.85,89.16 38.14,89.16 38.43,89.45 J2.VBUS1 41.19,89.45 JP2.1
VBUS2
  Top 0.406: J3.VBUS2 62.43,84.55 62.14,84.84 61.86,84.84 61.47,85.23 61.47,88.78 61.85,89.16 62.14,89.16 62.43,89.45 J3.VBUS1 65.19,89.45 JP3.1
VBUS3
  Top 0.406: J4.VBUS2 86.43,84.55 86.14,84.84 85.86,84.84 85.47,85.23 85.47,88.78 85.85,89.16 86.14,89.16 86.43,89.45 J4.VBUS1 89.19,89.45 JP4.1
VBUS4
  Top 0.406: J5.VBUS2 14.43,60.55 14.14,60.84 13.86,60.84 13.47,61.23 13.47,64.78 13.85,65.16 14.14,65.16 14.43,65.45 J5.VBUS1 17.19,65.45 JP5.1
VBUS5
  Top 0.406: J6.VBUS2 38.43,60.55 38.14,60.84 37.86,60.84 37.47,61.23 37.47,64.78 37.85,65.16 38.14,65.16 38.43,65.45 J6.VBUS1 41.19,65.45 JP6.1
VBUS6
  Top 0.406: J7.VBUS2 62.43,60.55 62.14,60.84 61.86,60.84 61.47,61.23 61.47,64.78 61.85,65.16 62.14,65.16 62.43,65.45 J7.VBUS1 65.19,65.45 JP7.1
VBUS7
  Top 0.406: J8.VBUS2 86.43,60.55 86.14,60.84 85.86,60.84 85.47,61.23 85.47,64.78 85.85,65.16 86.14,65.16 86.43,65.45 J8.VBUS1 89.19,65.45 JP8.1
VBUS8
  Top 0.406: J9.VBUS 16.14,39.02 | J9.VBUS_2 15.88,35.98 16.14,36.24 16.14,39.02 | 16.14,39.02 18.3,39.02 JP9.2 JP9.1
VBUS9
  Top 0.406: J10.VBUS 40.14,39.02 | J10.VBUS_2 39.88,35.98 40.14,36.24 40.14,39.02 | 40.14,39.02 42.3,39.02 JP10.2 JP10.1
VBUS10
  Top 0.406: J11.VBUS 64.14,39.02 | J11.VBUS_2 63.88,35.98 64.14,36.24 64.14,39.02 | 64.14,39.02 66.3,39.02 JP11.2 JP11.1
VBUS11
  Top 0.406: J12.VBUS 88.14,39.02 | J12.VBUS_2 87.88,35.98 88.14,36.24 88.14,39.02 | 88.14,39.02 90.3,39.02 JP12.2 JP12.1
VBUS12
  Top 0.406: J13.VBUS 16.14,15.02 | J13.VBUS_2 15.88,11.98 16.14,12.24 16.14,15.02 | 16.14,15.02 18.3,15.02 JP13.2 JP13.1
VBUS13
  Top 0.406: J14.VBUS 40.14,15.02 | J14.VBUS_2 39.88,11.98 40.14,12.24 40.14,15.02 | 40.14,15.02 42.3,15.02 JP14.2 JP14.1
VBUS14
  Top 0.406: J15.VBUS 64.14,15.02 | J15.VBUS_2 63.88,11.98 64.14,12.24 64.14,15.02 | 64.14,15.02 66.3,15.02 JP15.2 JP15.1
VBUS15
  Top 0.406: J16.VBUS 88.14,15.02 | J16.VBUS_2 87.88,11.98 88.14,12.24 88.14,15.02 | 88.14,15.02 90.3,15.02 JP16.2 JP16.1

## Text on the board
tPlace: VBUS | VBUS | VBUS | VBUS | GND | GND | GND | GND | VBUS | VBUS | VBUS | VBUS | GND | GND | GND | GND
bPlace: 1.0 | 1.0 | 1.0 | 1.0 | VBUS | VBUS | VBUS | VBUS | D+ | D+ | D+ | D+ | D- | D- | D- | D- | GND | GND | GND | GND | 7.0 | 2.0 | 3.5 | 7.0 | 2.0 | 3.5 | 7.0 | 2.0 | 3.5 | 7.0 | 2.0 | 3.5 | 1.0 | 1.0 | 1.0 | 1.0 | VBUS | VBUS | VBUS | VBUS | D+ | D+ | D+ | D+ | D- | D- | D- | D- | GND | GND | GND | GND | 7.0 | 2.0 | 3.5 | 7.0 | 2.0 | 3.5 | 7.0 | 2.0 | 3.5 | 7.0 | 2.0 | 3.5 | 1.0 | 1.0 | 1.0 | 1.0 | 7.0 | 2.0 | 3.5 | 7.0 | 2.0 | 3.5 | 7.0 | 2.0 | 3.5 | 7.0 | 2.0 | 3.5 | 1.0 | 1.0 | 1.0 | 1.0 | 7.0 | 2.0 | 3.5 | 7.0 | 2.0 | 3.5 | 7.0 | 2.0 | 3.5 | 7.0 | 2.0 | 3.5